# Altium PCB Mis - AFE LMP91000.PcbDoc
Units mm, origin at the board's own origin, x right, y up, seen from the top; angles counter-clockwise.
Board outline 13.55 x 18.45 mm, 2 copper layers (Top Layer, Bottom Layer); 3 components, 15 nets, 29 pads, 0 vias.
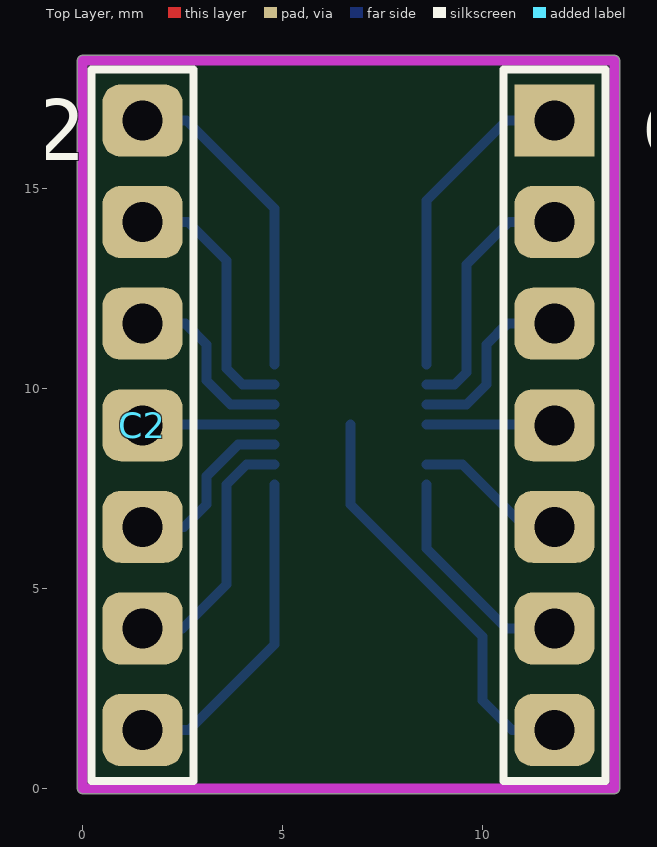
[diagram p0: Top Layer view]
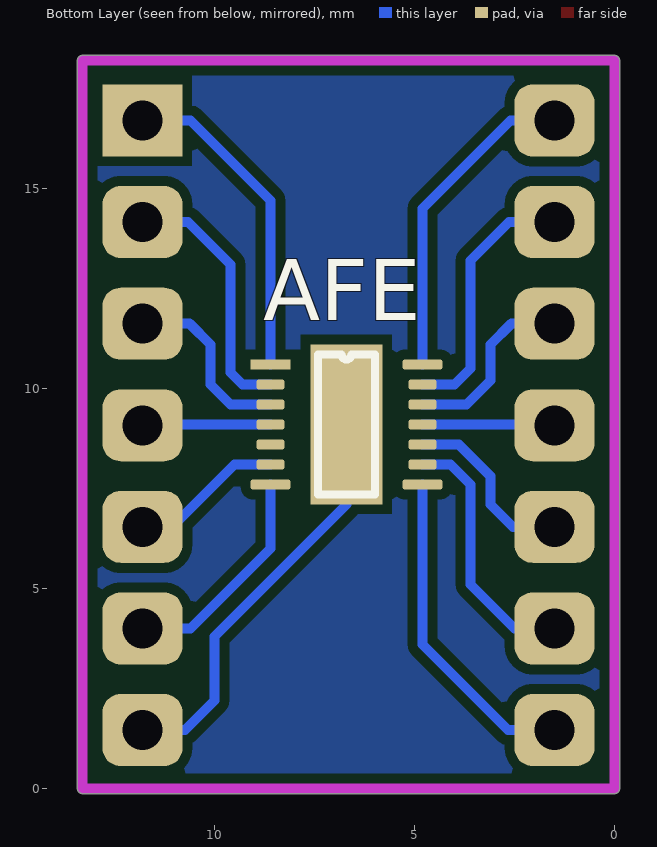
[diagram p1: Bottom Layer view, seen from below]

## Layer stack, top to bottom
Top Layer: signal copper 0.0356
Dielectric: dielectric 0.32, FR-4, Dk 4.8
Bottom Layer: signal copper 0.0356

## Board outline
-0.127,0 ccw(c0,0) 0,-0.127 13.3,-0.127 ccw(c13.3,0) 13.427,0 13.427,18.2 ccw(c13.3,18.2) 13.3,18.327 0,18.327 ccw(c0,18.2) -0.127,18.2

## Design rules (kind name [scope] priority, off if disabled: settings)
Clearance [All] p1: gap=0.25
PolygonConnect [All] p1: connectstyle=Relief reliefconductorwidth=0.254 reliefentries=4 polygonreliefangle="90 Angle" airgapwidth=0.254
RoutingVias [All] p1: holewidth=0.711 width=1.27 viastyle="Through Hole" minholewidth=0.711 minwidth=1.27 maxholewidth=0.711 maxwidth=1.27
SolderMaskExpansion [All] p1: expansion=0.102
Width [All] p1: maxlimit=1 minlimit=0.25 preferedwidth=0.25 minimp=50.000000 maximp=50.000000 favimp=50.000000
28 further rules are at their usual default settings.

## Components (designator, comment, footprint, x,y, rotation, side; value= is the part's Value field where it differs from the comment)
AFE "LMP91000" WSON14 8.6,10.6 r180 bottom
C1 "Header 7" HDR1X7#1 11.8,16.7 r270 top
C2 "Header 7" HDR1X7#2 1.5,16.7 r270 top

## Footprints (in the part's own frame and the unit in brackets; to place one, negate y for a bottom-side part, rotate by r counter-clockwise, add the part's x,y. Pads: shape width x height; smd on the part's side, far side on the other; paste and mask are expansions set on the pad)
HDR1X7#1 [mm] "Connector; Header; 7 Position"
  rect 1.8x2 hole 1: 1(0,0)
  rrect50% 1.8x2 hole 1: 2(2.54,0) 3(5.08,0) 4(7.62,0) 5(10.16,0) 6(12.7,0) 7(15.24,0)
  silkscreen extent -1.27,-1.27 16.51,1.27
HDR1X7#2 [mm] "Connector; Header; 7 Position"
  rrect50% 1.8x2 hole 1: 1(0,0) 2(2.54,0) 3(5.08,0) 4(7.62,0) 5(10.16,0) 6(12.7,0) 7(15.24,0)
  silkscreen extent -1.27,-1.27 16.51,1.27
WSON14 [mm]
  rect 1x0.25 smd: 1(0,0)
  rrect50% 0.7x0.25 smd: 2(0,-0.5) 3(0,-1) 4(0,-1.5) 5(0,-2) 6(0,-2.5) 9(3.8,-2.5) 10(3.8,-2) 11(3.8,-1.5) 12(3.8,-1) 13(3.8,-0.5)
  rrect50% 1x0.25 smd: 7(0,-3) 8(3.8,-3) 14(3.8,0)
  rect 1.8x4 smd: 15(1.9,-1.5)
  silkscreen extent 1.18,-3.25 2.62,0.25

## Part data
C1 C2: "Header, 7-Pin"

## Nets (pads, with @x,y where several pads share a name; then routed paths per layer and width w, separated by ;. In a path a pad name is that pad's centre, name@x,y a point inside that pad or via, vN(x,y) a via of type N, cw(c..) or ccw(c..) an arc to the next point about the centre after c; other vN are vias at no path point)
NetAFE_1: AFE.1 C1.1 | length 8.1
  Bottom Layer w0.25: AFE.1 8.6,14.7 10.6,16.7 C1.1
NetAFE_2: AFE.2 C1.2 | length 6.5
  Bottom Layer w0.25: AFE.2 9.3,10.1 9.6,10.4 9.6,13.1 10.66,14.16 C1.2
NetAFE_3: AFE.3 C1.3 | length 4.6
  Bottom Layer w0.25: AFE.3 9.6,9.6 10.1,10.1 10.1,11.1 10.62,11.62 C1.3
NetAFE_4: AFE.4 C1.4 | length 3.2
  Bottom Layer w0.25: AFE.4 11.78,9.1 C1.4
NetAFE_5: AFE.5
NetAFE_6: AFE.6 C1.5 | length 3.8
  Bottom Layer w0.25: AFE.6 9.5,8.1 11.06,6.54 C1.5
NetAFE_7: AFE.7 C1.6 | length 5.6
  Bottom Layer w0.25: AFE.7 8.6,6 10.6,4 C1.6
NetAFE_8: AFE.8 C2.7 | length 8.2
  Bottom Layer w0.25: C2.7 2.66,1.46 4.8,3.6 AFE.8
NetAFE_9: AFE.9 C2.6 | length 6.5
  Bottom Layer w0.25: C2.6 2.5,4 3.6,5.1 3.6,7.6 4.1,8.1 AFE.9
NetAFE_10: AFE.10 C2.5 | length 4.6
  Bottom Layer w0.25: C2.5 2.54,6.54 3.1,7.1 3.1,7.807 3.893,8.6 AFE.10
NetAFE_11: AFE.11 C2.4 | length 3.3
  Bottom Layer w0.25: C2.4 1.52,9.1 AFE.11
NetAFE_12: AFE.12 C2.3 | length 4.7
  Bottom Layer w0.25: C2.3 2.58,11.62 3.1,11.1 3.1,10.2 3.7,9.6 AFE.12
NetAFE_13: AFE.13 C2.2 | length 6.6
  Bottom Layer w0.25: C2.2 2.64,14.16 3.6,13.2 3.6,10.5 4,10.1 AFE.13
NetAFE_14: AFE.14 C2.1 | length 8.1
  Bottom Layer w0.25: C2.1 2.6,16.7 4.8,14.5 AFE.14
NetAFE_15: AFE.15 C1.7 | length 10.4
  Bottom Layer w0.25: AFE.15 6.7,7.1 10,3.8 10,2.2 10.74,1.46 C1.7

## Polygon pours and split planes (outlines as drawn)
no net on Bottom Layer "Bottom Layer-No Net" (solid, pour order 3): 0,18.2 13.3,18.2 13.3,0 0,0

## Keep-outs
Keep-Out Layer:
  lines w0.254: 0,0 13.3,0 13.3,18.2 0,18.2 0,0

## Dimensions
11.8,1.46 to 1.5,1.46 on Top Overlay